# Altium PCB 1069.PcbDoc (part 2 of 3)
Units mil, origin at the board's own origin, x right, y up, seen from the top; angles counter-clockwise.
Board outline 10010 x 6010 mil, 2 copper layers (Top Layer, Bottom Layer); 500 components, 334 nets, 1630 pads, 397 vias.
Unrouted connection lines stored in the file: 1187.
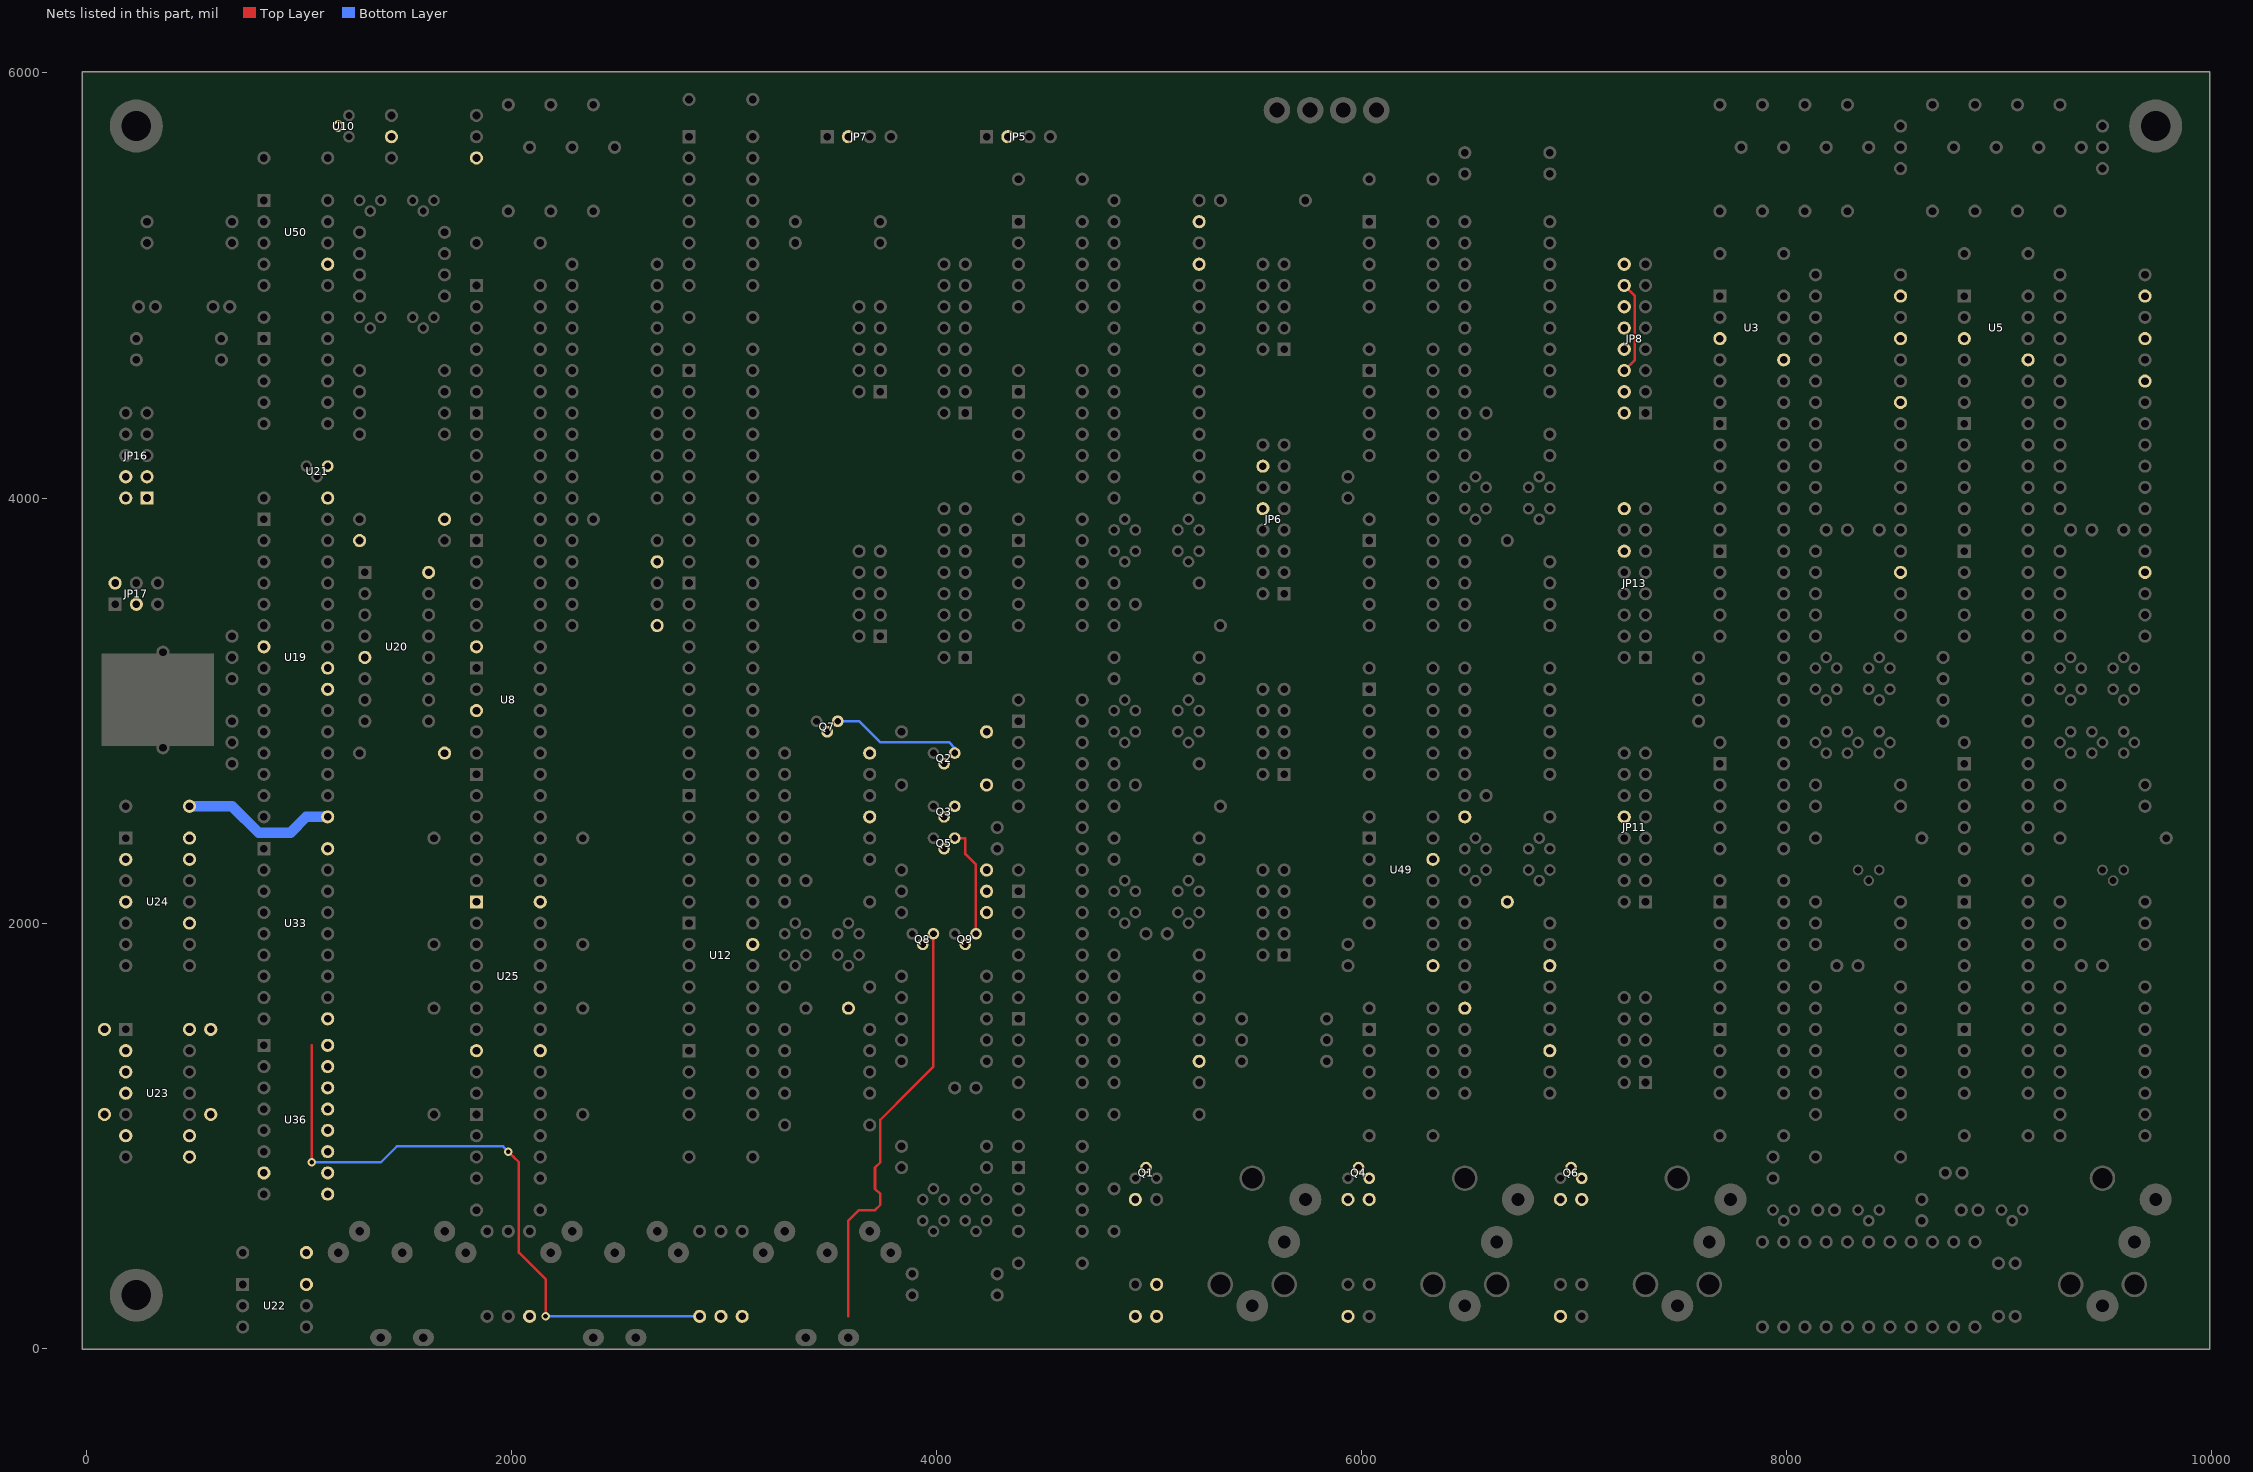
[diagram p2: the nets of this part, all layers, seen from the top]

## Via types
v1: diameter 40, hole 22, Top Layer to Bottom Layer, 395 vias
v2: diameter 62, hole 36, Top Layer to Bottom Layer, 2 vias

## Nets (pads, with @x,y where several pads share a name; then routed paths per layer and width w, separated by ;. In a path a pad name is that pad's centre, name@x,y a point inside that pad or via, vN(x,y) a via of type N, cw(c..) or ccw(c..) an arc to the next point about the centre after c; other vN are vias at no path point) (continued)
N52070: Q4.COLL R10.1
N52133: Q6.COLL R13.1
N52243: Q1.BASE R8.2
N52272: Q4.BASE R12.2
N52301: Q6.BASE R15.2
N79138: R82.2 U23.2 U23.3
N79300: R85.1 U23.6 U23.9
N451920: Q2.BASE R9.2
N453781: Q3.BASE R11.2
N454380: Q5.BASE R14.2
N455450: Q7.BASE R16.2
N456031: Q8.BASE R17.2
N457061: Q9.BASE R18.2
N515231: D1.CATH R5.2
N758691: R83.1 U23.4
N760550: R84.1 U23.8
O0: U25.1 U36.15
O1: U25.16 U36.14
O2: U25.9 U36.13
O3: U25.8 U36.12
O4: U36.11
O5: U36.10
O6: U36.9
O7: U36.7
PW1: JP13.12 R105.1
PW2: JP13.16 R183.1
REF: R20.1 R21.1 R24.2 R25.1 U10.2 U50.5
SCK: JP17.3 U20.5
SQR: D13.CATH R216.1 R218.2
VATN_H1: C105.2 JP6.14 JP8.6 JP8.14 R111.1 R127.1 R145.1 R217.1 U49.7 | length 441.4
  Top Layer w12: JP8.6@7235,4600 7285,4650 7285,4950 JP8.14@7235,5000
VATN_H2: C20.2 JP6.10 JP8.2 JP8.10 JP11.10 R28.2 R113.1 R115.1 R119.1 R147.1 R151.1 U12.7
VATN_W0: JP8.4 U5.5
VATN_W1: JP8.8 U5.3
VATN_W2: JP8.12 U3.5
VATN_W3: JP8.16 U3.3
VCC: C38.1 C39.1 C40.1 C41.1 C66.1 C124.1 D1.ANOD D2.ANOD D3.ANOD JP16.1 JP16.2 JP16.3 JP16.4 JP17.2 Q2.EMIT Q3.EMIT Q5.EMIT Q7.EMIT Q8.EMIT Q9.EMIT R79.1 R81.2 R82.1 R85.2 R86.2 R118.1 R122.1 U8.3 U19.7 U19.20 U19.21 U20.16 U21.1 U22.6 U23.14 U24.2 U24.4 U24.10 U24.13 U24.14 U33.16 U36.16 | length 6974.6
  Top Layer w12: v1(1060,875) 1060,1425 ; v1(1985,925) 2010,900 2035,875 2035,450 2160,325 v1(2160,150) ; 3585,150 3585,600 3635,650 3710,650 3735,675 3735,725 3710,750 3710,850 3735,875 3735,1075 3885,1225 3985,1325 Q8.EMIT@3985,1950 ; Q5.EMIT@4085,2400 4135,2400 4135,2325 4185,2275 Q9.EMIT@4185,1950
  Bottom Layer w12: v1(1060,875) 1385,875 1460,950 1960,950 v1(1985,925) ; v1(2160,150) R81.2@2860,150 ; Q7.EMIT@3535,2950 3635,2950 3735,2850 4060,2850 4085,2825 Q2.EMIT@4085,2800
  Bottom Layer w50: C41.1@485,2550 685,2550 810,2425 960,2425 1035,2500 C39.1@1135,2500
VP1: JP5.2 R95.1
VP2: JP7.2 R173.1
pads on no net: J1.2 J1.7 J1.8 J1.9 J2.2 J2.7 J2.8 J2.9 J3.2 J3.7 J3.8 J3.9 J4.2 J4.7 J4.8 J4.9 JP2.8 JP2.10 JP3.8 JP3.10 JP6.3 JP6.7 JP6.11 JP6.15 JP8.3 JP8.7 JP8.11 JP8.15 JP9.3 JP9.7 JP9.11 JP9.15 JP10.3 JP10.7 JP10.11 JP10.15 JP11.3 JP11.7 JP11.11 JP11.13 JP11.14 JP11.15 JP11.16 JP12.3 JP12.9 JP13.3 JP13.7 JP13.11 JP13.15 JP14.3 JP14.9 MC1.1 MC1.2 MC1.3 MC2.1 MC2.3 MC3.1 MC3.3 U22.3 U23.10 U23.11 U23.12 U23.13 U24.6 U25.12 U29.12 U30.12 U31.12 U33.7 U33.9 U38.1 U38.5 U38.8 U43.1 U43.5 U43.8 Y1.0
copper on no net: | length 883033.1
  Top Layer w12: v1(35,3750) 10,3725 10,1075 35,1050 135,1050 185,1100 ; v1(60,3800) 85,3775 85,3700 60,3675 35,3650 35,1650 185,1500 ; v1(60,3925) 60,4150 110,4200 185,4200 ; 85,1100 85,1225 160,1300 185,1300 185,1400 ; v1(235,3350) 235,3500 ; 235,4650 235,4750 ; 245.63,4900 235,4900 235,5150 260,5175 285,5200 ; 285,4200 335,4150 v1(335,3850) ; v1(310,1800) v1(310,2400) ; v1(360,1500) 360,525 435,450 v1(435,175) ; v1(485,350) 485,500 410,575 410,1550 360,1600 360,2550 v1(585,2775) ; 485,1000 585,1100 ; 485,2200 535,2200 560,2175 v1(560,1950) ; v1(585,2700) 585,2325 660,2250 660,975 685,950 685,575 610,500 v1(610,400) ; 595.63,4900 595.63,4775 620.63,4750 635,4750 ; v1(610,2200) 610,1925 585,1900 ; v1(635,925) 635,1625 585,1675 585,1900 ; v1(635,2625) 635,2325 710,2250 710,575 v1(735,550) ; 685,3150 685,3250 ; v1(685,3500) v1(685,3900) ; v1(760,2200) 860,2200 885,2225 885,3550 835,3600 ; 835,1325 885,1325 910,1350 910,2100 910,2170 935,2195 935,3325 960,3350 v1(960,3400) ; 835,1425 885,1475 885,2125 885,2190 910,2215 910,3425 935,3450 935,3475 v1(935,3500) ; 835,4650 835,4750 ; 835,5300 835,5400 ; v1(960,2150) 960,3300 985,3325 1010,3350 1010,3675 1035,3700 1135,3700 ; v1(985,5225) v1(985,5750) ; v1(1000,2250) 1000,2310 985,2325 985,3275 1060,3350 1060,3575 1085,3600 1135,3600 ; 1135,2050 1160,2075 1310,2225 1310,2525 1185,2650 1185,3025 1210,3050 1235,3050 1260,3075 1260,3480 1265,3485 v1(1265,3500) ; 1135,2600 1210,2525 v1(1210,2300) ; v1(1160,75) 1285,200 1285,550 ; v1(1210,2000) 1210,2075 1335,2200 1335,2550 1235,2650 v1(1235,2700) ; 1285,3900 1335,3850 1335,3675 1310,3650 ; 1285,4300 1285,4400 ; 1285,4600 1385,4700 1385,4850 ; 1285,5250 1335,5250 1385,5300 1385,5400 ; v1(1310,1950) 1310,2115 1415,2220 1415,2285 1435,2305 1435,2665 1360,2740 1360,2825 v1(1385,2850) ; 1310,3350 1360,3300 1360,3060 1370,3050 v1(1370,3000) ; v1(1360,3400) 1385,3375 1385,3075 1410,3050 1410,2950 1335,2875 1335,2675 1360,2650 1360,2285 1375,2270 v1(1375,2240) ; v1(1385,325) v1(1385,975) ; v1(1385,1125) v1(1385,1450) ; v1(1385,3500) 1385,3430 1410,3405 1410,3100 1435,3075 1435,2825 1410,2800 v1(1410,2750) ; v1(1385,3925) 1385,3555 1435,3505 1435,3125 1460,3100 1460,2700 1510,2650 1510,2175 1460,2125 1460,2025 1485,2000 v1(1485,1850) ; v1(1435,1750) 1435,2150 1460,2175 v1(1460,2225) ; v1(1435,3575) 1435,3550 1460,3525 1460,3175 1510,3125 v1(1510,2900) ; v1(1460,1025) v1(1460,1400) ; v1(1485,3875) 1485,3225 1560,3150 1610,3150 1610,3050 1610,2950 ; v1(1510,1225) 1510,1775 1535,1800 1535,1900 1510,1925 v1(1510,2050) ; v1(1510,4500) 1510,4825 1535,4850 ; v1(1535,3625) 1535,3275 1560,3250 1610,3250 ; 1535,5400 1535,5300 1685,5150 ; v1(1560,900) 1560,1175 1635,1250 1635,1600 ; v1(1560,1325) v1(1560,2100) ; v1(1585,2725) 1585,2325 1610,2300 v1(1610,2150) ; v1(1610,2815) 1610,2800 1635,2775 v1(1635,2600) ; 1635,4850 1635,4750 1560,4675 v1(1560,4600) 1560,4350 1610,4300 1685,4300 ; 1635,5400 1685,5350 1685,5250 1735,5200 1735,5125 1685,5075 1685,5050 1635,5000 1635,4925 1685,4875 1685,4750 1610,4675 1610,4575 1585,4550 1585,4450 1635,4400 1685,4400 ; v1(1685,1500) v1(1685,2000) ; 1835,1000 1835,1100 ; 1835,2600 1835,2700 ; 1835,5600 1835,5325 1910,5250 1910,4600 2035,4475 2035,4400 1985,4350 1985,3525 1935,3475 v1(1910,3450) ; 1835,5700 1910,5625 1910,5550 1985,5475 1985,5350 ; v1(1910,2380) 1910,2350 1970,2290 1970,2055 1960,2045 1960,1970 1970,1960 v1(1970,1900) ; v1(1985,1600) 1985,1545 2010,1520 2010,1225 2060,1175 2060,875 2135,800 ; v1(2005,2000) 2005,2035 2010,2040 2010,3150 1985,3175 v1(1985,3200) 1985,3250 2010,3275 2010,3775 2035,3800 v1(2035,3900) ; v1(2110,5775) 2110,5725 2135,5700 2135,5600 2110,5575 2110,5300 2135,5275 2235,5175 2235,5050 2285,5000 ; v1(2120,5875) 2120,5840 2185,5775 2185,5700 2160,5675 2160,5575 2135,5550 2135,5325 2285,5175 2285,5100 ; 2135,900 2135,1000 ; 2135,2500 2135,2600 ; 2135,4700 2160,4700 2185,4700 2210,4725 2210,4875 2235,4900 2285,4900 ; 2185,5350 2360,5175 v1(2360,4750) ; 2185,5850 2235,5800 2235,5700 2185,5650 2185,5475 2210,5450 2435,5450 2460,5425 v1(2460,5100) ; v1(2285,2600) v1(2285,3150) ; 2285,3400 2285,3500 ; 2285,3600 2285,3700 ; 2285,3800 2310,3775 2335,3750 v1(2335,3100) ; 2285,4000 2335,4050 2335,4150 2285,4200 ; 2285,4600 2285,4700 ; 2335,1900 v1(2335,2325) ; v1(2335,4250) 2335,4670 2410,4745 2410,5325 2385,5350 ; 2385,3900 2385,3825 2410,3800 v1(2410,3250) ; 2385,5850 2585,5850 2635,5800 2635,4975 2610,4950 2610,4525 v1(2585,4500) ; v1(2410,4650) 2360,4600 2360,4325 2385,4300 2385,4050 2460,3975 2460,3725 2435,3700 2435,3300 2460,3275 2460,2050 2435,2025 v1(2435,1950) ; v1(2460,4900) 2460,5025 2535,5100 2535,5125 v1(2535,5150) ; v1(2485,1375) 2485,1650 v1(2485,3650) ; v1(2485,4600) 2460,4575 2460,4525 2485,4500 2485,4400 2585,4300 2585,4200 2685,4100 ; v1(2510,4550) 2535,4575 2535,4650 2560,4675 2560,5000 2585,5025 2585,5700 v1(2510,5775) ; v1(2510,4800) v1(2510,5000) ; v1(2535,725) v1(2535,1000) ; v1(2535,4450) 2535,4520 2585,4570 2585,4975 2610,5000 2610,5710 2585,5735 v1(2585,5775) ; v1(2585,1450) 2585,1825 2610,1850 v1(2610,2550) ; v1(2585,3550) 2585,3400 2610,3375 2610,3075 2635,3050 v1(2635,2900) 2635,2850 2660,2825 2660,1850 2635,1825 v1(2635,1750) ; v1(2660,3100) 2660,3050 2685,3025 2685,1350 2710,1325 2835,1200 ; 2685,3400 2635,3450 2635,3650 2685,3700 ; 2685,4200 2635,4250 2635,4850 2685,4900 ; 2835,1300 2835,1400 ; 2835,5700 2960,5575 2960,5250 2945,5235 2945,5170 2960,5155 2960,3950 2970,3940 v1(2970,3900) ; v1(2895,1640) 3035,1500 v1(3035,1450) ; v1(2935,775) 2935,1075 2985,1125 v1(2985,1400) ; v1(2935,1700) 2935,1725 2960,1750 2960,2125 3010,2175 3010,2550 3035,2575 v1(3035,2600) ; v1(2935,2300) 2985,2350 2985,3525 3010,3550 3010,4050 3000,4060 v1(3000,4100) 3000,4160 2985,4180 v1(2985,5200) ; v1(2970,3600) v1(2970,3850) ; 2985,150 3035,100 3210,100 3260,150 4935,150 4985,100 5935,100 ; v1(2985,1650) 2985,1700 3010,1725 3010,1850 3000,1860 v1(3000,1900) ; v1(2985,5700) 2985,5650 3010,5625 3010,5255 3025,5240 3025,5165 3010,5150 3010,4750 v1(3035,4725) ; v1(3035,1050) 3035,900 3010,875 3010,750 3035,725 3035,375 3085,325 3085,150 ; v1(3060,825) 3060,985 3075,1000 3075,1125 3060,1140 3060,1250 3110,1300 3135,1300 ; 3135,1700 3210,1700 v1(3210,1755) ; 3135,2200 3210,2200 v1(3210,2000) ; 3285,1050 3285,1200 ; 3285,1850 3285,1775 3310,1750 3335,1750 3385,1700 3385,1600 ; 3285,1950 3385,1850 3410,1850 3510,1950 3535,1950 3635,1850 ; 3285,2100 3285,2200 ; 3285,2300 3285,2400 ; v1(3285,2950) v1(3285,4600) v1(3285,4950) ; 3335,1800 3460,1800 3485,1775 3485,1575 3560,1500 3685,1500 3685,1550 3735,1600 3735,1725 3710,1750 3710,1950 3660,2000 3585,2000 3585,2675 3610,2700 3685,2700 ; v1(3335,3600) 3335,3450 3310,3425 3310,3000 3335,2975 3335,2700 3360,2675 v1(3360,2650) ; v1(3335,4500) 3335,5200 ; v1(3360,2400) 3360,2500 3410,2550 3410,2900 3385,2925 3385,3025 3360,3050 3360,3250 3335,3275 3335,3350 v1(3385,3400) 3385,3450 3360,3475 3360,3525 3385,3550 3385,3850 3360,3875 3360,3950 3385,3975 v1(3385,4400) 3385,4525 3360,4550 3360,4725 3385,4750 v1(3385,5525) ; 3385,1950 3385,2200 ; v1(3385,3300) 3385,3075 3435,3025 3435,2950 ; v1(3410,3500) v1(3410,3900) ; v1(3435,1450) v1(3435,1700) ; v1(3460,3200) v1(3460,3450) v1(3460,4350) 3460,4400 3485,4425 3485,4725 3460,4750 3460,5150 v1(3460,5250) ; v1(3460,5525) 3460,5350 3510,5300 3510,5240 3485,5215 3485,4775 3510,4750 3510,3975 3485,3950 3485,3810 3510,3785 v1(3510,3100) ; v1(3500,2815) 3585,2900 3585,3150 3560,3175 3535,3200 3535,3810 3510,3835 3510,3925 3535,3950 3535,4975 v1(3535,5000) ; v1(3535,2250) 3535,2750 3685,2900 3685,3150 3585,3250 3585,3800 3585,3825 v1(3560,3850) ; v1(3575,4050) 3560,4065 3560,4585 3575,4600 v1(3575,4650) ; 3635,1950 3685,1900 3685,1700 ; v1(3685,700) 3685,950 3610,1025 3610,1225 3685,1300 ; 3685,1200 3760,1275 3760,1750 3735,1775 v1(3735,3200) ; v1(3685,4975) 3685,3950 3710,3925 v1(3735,3900) ; 3735,3550 3785,3500 3785,2625 3885,2525 3885,1950 ; 3735,3650 3810,3575 3810,3100 3910,3000 3910,2925 3885,2900 3885,2675 3910,2650 3910,2500 3935,2475 3935,2250 4085,2100 4085,1950 ; v1(3760,825) 3810,775 3810,575 3885,500 3885,425 3835,375 3835,300 3885,250 ; v1(3785,2500) 3785,2450 3760,2425 3760,1800 3785,1775 3785,1725 3810,1700 3860,1700 3885,1675 v1(3885,1600) ; v1(3785,3825) 3785,3850 3810,3875 3810,4375 v1(3785,4400) ; v1(3810,2325) 3810,2300 3785,2275 3785,1850 3835,1800 3835,1750 ; 3835,850 3835,800 3935,700 4035,600 4135,700 4235,600 ; 3835,1550 3835,1650 ; 3835,2050 3835,1875 3885,1825 3885,1725 v1(3935,1675) ; v1(3860,4700) 3860,4475 3860,3150 3960,3050 3960,2875 3935,2850 3935,2725 3985,2675 3985,2550 ; v1(3860,4800) 3860,4775 3810,4725 3810,4685 3835,4660 3835,4450 3835,3125 3935,3025 3935,2900 3910,2875 3910,2850 3910,2700 3935,2675 3935,2525 3985,2475 3985,2400 ; 3885,350 3985,450 3985,550 ; v1(3885,5050) 3910,5025 v1(3910,4575) ; v1(3910,4500) 3885,4475 3885,3175 3985,3075 3985,2800 ; 3935,1900 v1(3935,2150) ; v1(3935,3350) 3935,3225 4035,3125 v1(4035,3025) ; v1(3935,3550) 3935,3590 3960,3615 3960,5300 3985,5325 v1(3985,5600) ; v1(3985,1250) 4110,1375 4110,1625 4135,1650 4235,1650 4235,1750 ; v1(4035,950) 4035,700 4035,1175 4085,1225 ; 4035,5100 4085,5150 4185,5150 4210,5125 v1(4210,4000) ; v1(4035,5650) 4035,5325 3985,5275 3985,5000 ; v1(4085,3125) 4085,3175 4035,3225 4035,3250 3985,3250 3985,3450 ; 4135,1900 4210,1900 4235,1925 4235,2050 ; 4135,3250 4085,3250 4085,3450 ; 4135,5000 4085,5000 4085,4800 ; 4185,1225 4185,1175 4160,1150 4160,900 4210,850 4235,850 ; v1(4185,3075) 4210,3100 v1(4210,3900) ; 4235,5700 v1(4235,5900) ; 4285,2350 4285,2450 ; v1(4485,4700) 4485,4675 4535,4625 v1(4535,4400) ; v1(4500,1800) 4500,2155 4515,2170 v1(4515,2200) ; v1(4510,2350) 4610,2250 4610,2140 4565,2095 v1(4565,2050) ; v1(4520,3700) v1(4520,3850) ; v1(4535,2500) v1(4535,2950) ; v1(4535,3450) 4535,3500 4560,3525 v1(4560,3800) ; 4535,5700 v1(4535,5900) ; v1(4545,1900) 4545,1930 4525,1950 4525,2125 v1(4550,2150) ; v1(4610,500) 4610,650 4685,725 4685,750 ; 4685,2550 4760,2550 v1(4760,2200) ; 4760,1975 v1(4785,1975) ; 4760,3700 4885,3700 ; 4835,1100 4960,1225 4960,1500 4910,1550 4835,1550 ; 4835,1750 4860,1725 4885,1700 4960,1700 4985,1725 4985,1900 4985,1950 ; 4835,2150 4935,2050 v1(4935,1750) ; 4835,2400 4935,2500 4935,2650 4885,2700 4885,2775 4835,2825 4835,2900 ; 4835,2650 4835,2750 ; 4835,3000 4935,2900 v1(4935,2750) ; 4835,3250 4885,3300 4885,3450 4835,3500 ; 4835,3850 4935,3750 v1(4935,3600) ; 4835,4100 4835,4200 4835,4300 ; 4835,4400 4910,4400 4935,4375 4935,4050 5010,3975 5010,3525 5035,3500 5035,3350 5010,3325 v1(5010,3250) ; 4835,4500 4860,4500 4910,4550 4910,4825 4835,4900 ; 4835,4600 4835,4700 4835,4800 ; 4835,5200 4885,5200 4910,5175 4910,4900 4960,4850 v1(4960,4800) ; 4835,5400 5060,5400 5135,5325 5135,4650 5185,4600 5235,4600 ; 4935,300 v1(4935,625) ; 4935,700 4985,750 4985,850 ; 4935,800 v1(4935,1025) ; 4935,3000 4935,2975 4985,2925 4985,2725 5010,2700 v1(5010,2550) ; 4935,3850 4935,3825 4985,3775 v1(4985,3400) ; v1(5010,2025) v1(5010,2200) ; 5035,150 5035,300 ; 5035,700 5035,800 ; v1(5035,2850) 5035,2925 5010,2950 4985,2975 v1(4985,3050) 4985,3150 5060,3225 5185,3350 5185,3700 5110,3700 5085,3725 v1(5085,3900) v1(5085,4900) ; v1(5085,1350) v1(5085,1600) ; v1(5085,1675) 5085,1950 5085,2025 5110,2050 5135,2050 ; v1(5135,2300) 5135,2150 5235,2050 ; v1(5135,3150) 5135,3000 5235,2900 ; v1(5135,4000) 5135,3850 5235,3750 ; 5235,1250 5285,1250 5310,1275 5310,1875 5335,1900 5335,2025 5335,2155 5310,2180 5310,2475 5285,2500 5285,2575 5360,2650 5360,3175 v1(5335,3200) ; 5235,1450 5235,1550 ; 5235,1850 5235,1900 5285,1950 5285,2100 5235,2150 ; 5235,2300 5185,2350 5185,2525 5335,2675 5335,3125 5310,3150 5235,3150 5285,3150 5285,3175 5285,3275 5260,3300 5260,3475 5285,3500 5310,3500 5335,3525 5335,3725 5285,3775 5285,3950 5235,4000 ; 5235,4200 5310,4125 5310,3800 5360,3750 5360,3500 5335,3475 5310,3475 5285,3450 5285,3325 5410,3200 5410,2850 5385,2825 5385,2600 5335,2550 ; 5235,4300 5310,4375 v1(5310,5250) ; 5235,4900 5235,5000 ; 5335,3400 5335,3325 5435,3225 v1(5435,2800) v1(5435,2400) ; v1(5360,2200) 5360,2050 5435,1975 5435,1550 ; v1(5360,4700) 5360,4675 5385,4650 5385,4475 5410,4450 5410,4200 5335,4125 5335,3850 5535,3650 ; v1(5385,2350) 5410,2325 5410,2075 5535,1950 ; v1(5385,4100) 5385,4000 5535,3850 ; v1(5385,5100) 5385,5000 5360,4975 5360,4925 5410,4875 5410,4500 5435,4475 5435,4050 5535,3950 ; v1(5410,4950) 5410,4925 5435,4900 5435,4525 5460,4500 5460,4125 5535,4050 ; v1(5435,900) 5435,1350 ; 5435,1450 5435,1550 ; v1(5435,5350) 5435,5030 5460,5005 5460,4550 5485,4525 5485,4200 5535,4150 ; v1(5485,2450) 5485,2350 5460,2325 5460,2125 5535,2050 ; v1(5485,3250) 5485,3225 5460,3200 5460,2975 5535,2900 ; v1(5485,5050) 5485,4575 5535,4525 5535,4250 ; v1(5535,1650) 5535,1850 ; 5535,3750 5585,3700 5585,3450 5560,3425 v1(5560,3400) ; v1(5710,2750) v1(5710,3450) ; v1(5785,2350) v1(5785,4100) ; v1(5835,2850) v1(5835,3150) ; v1(5835,5150) v1(5835,5700) ; v1(5860,2400) 5860,2000 5935,1925 5935,1900 5935,1800 ; v1(5885,4600) 5885,4150 5935,4100 ; v1(5885,5350) v1(5885,5650) ; 5935,300 v1(5935,600) ; 5935,700 5985,750 5985,850 ; 5935,800 v1(5935,925) ; 6035,150 6035,300 ; 6035,700 6035,800 ; v1(6135,5000) 6135,4775 6160,4750 v1(6160,3550) ; v1(6185,1300) 6185,1350 6160,1375 6160,1650 6135,1675 6135,1850 6160,1875 6160,2525 v1(6185,2550) ; v1(6185,2900) 6185,2660 v1(6245,2600) v1(6245,2390) ; v1(6195,1800) 6195,2415 6205,2425 v1(6205,2450) ; v1(6200,3700) v1(6200,3940) ; v1(6200,4350) v1(6200,4500) ; v1(6200,4600) v1(6200,4750) ; v1(6260,4625) 6260,4680 6260,4775 6185,4850 v1(6185,5200) 6185,5225 6210,5250 6210,5525 6310,5625 6485,5625 ; 6335,5100 6435,5200 6435,5425 6485,5475 6485,5525 ; 6485,1300 6660,1300 6710,1350 6960,1350 7010,1400 v1(7010,2900) ; 6485,2000 6535,2050 6535,2200 ; 6485,2700 6535,2650 6535,2475 6485,2425 6485,2350 6585,2250 ; 6485,2800 6485,2900 6485,3000 ; 6485,3100 6485,3200 ; 6485,3700 6535,3700 6560,3725 6560,3800 6685,3925 v1(6685,4200) ; 6485,4300 6535,4250 6535,4175 6485,4125 6485,4050 6585,3950 ; 6485,4400 6485,4375 6585,4275 6585,4050 ; 6485,4500 6485,4600 ; 6485,4800 6485,4900 6485,5000 6485,5075 6485,5100 6485,5200 6485,5300 ; 6535,3900 6610,3900 6635,3925 v1(6635,4100) ; 6585,2350 6635,2300 v1(6635,2050) ; 6585,2600 v1(6585,2950) ; v1(6610,3550) v1(6610,3775) ; v1(6610,5575) 6610,5200 6760,5050 v1(6760,4950) ; 6685,2100 6685,2000 6885,1800 ; v1(6685,2175) 6735,2225 6735,2375 6760,2400 6835,2400 6835,2450 6810,2475 6810,2575 6810,3150 6860,3200 6885,3200 ; 6685,3800 6785,3900 6785,3950 ; v1(6760,3350) 6760,3450 6785,3475 6810,3500 6885,3500 ; 6785,2350 6885,2250 ; 6785,4050 6885,3950 ; v1(6885,925) 6885,1200 7035,1350 7035,2250 7060,2275 v1(7060,2300) ; 6885,1400 6935,1400 6985,1450 6985,2450 6960,2475 v1(6960,2500) v1(6960,4400) ; 6885,1600 6885,1700 ; 6885,4050 6885,4200 ; 6885,4500 6960,4500 6985,4475 7010,4450 v1(7010,3350) ; 6885,5525 6960,5525 6985,5500 6985,5375 7060,5300 v1(7060,3450) ; 6935,150 6935,100 5935,100 ; 6935,300 v1(6935,600) ; 6935,700 6985,750 6985,850 ; 6935,800 v1(6935,1000) ; 7035,150 7035,300 ; 7035,700 7035,800 ; v1(7035,3000) 7035,2950 7060,2925 7060,2875 7035,2850 7035,2500 7135,2400 7135,2250 7085,2200 7085,1625 7110,1600 v1(7110,1550) ; v1(7060,1175) 7060,2225 7085,2250 7110,2275 7110,2325 7060,2375 v1(7060,2400) ; v1(7110,3850) v1(7110,4250) ; v1(7135,1150) 7135,1475 7210,1550 7235,1550 ; v1(7160,4000) 7160,3825 7235,3750 ; v1(7210,2875) 7185,2850 7185,2250 7235,2200 ; 7235,2100 7160,2175 7160,3175 7235,3250 ; 7235,3650 7285,3700 7285,3800 7235,3850 ; 7235,3950 v1(7235,4100) ; 7235,4400 7185,4400 7160,4425 7160,4725 7235,4800 7185,4850 7185,5225 7235,5275 v1(7235,5510) ; 7235,5000 7285,5050 7285,5225 7385,5325 v1(7610,5325) ; 7335,3650 7385,3700 7385,3800 7335,3850 ; v1(7385,625) 7385,875 7485,975 v1(7485,1600) ; v1(7485,4750) v1(7485,5125) ; v1(7510,3650) 7510,3025 7560,2975 7585,2950 ; v1(7535,4600) 7535,4850 v1(7535,4950) ; v1(7760,3400) 7760,3450 7810,3500 7810,3560 7798,3572 7798,3633 7810,3645 7810,4500 7735,4575 7735,5225 7685,5275 7685,5350 7685,5475 7785,5575 7785,5650 ; v1(7810,3250) 7810,3450 7835,3475 v1(7835,3600) ; v1(7850,4150) 7850,4110 7860,4100 7860,3650 7872,3638 7872,3572 7860,3560 v1(7860,2875) ; v1(7850,4250) 7860,4260 7860,4300 7885,4325 v1(7885,4450) ; 7885,500 7885,450 7860,425 7860,325 7985,200 7985,100 ; 7885,5350 7885,5550 7985,5650 ; 7985,500 8035,550 8035,650 ; 7985,600 7935,550 7935,350 8110,175 8185,100 ; 8060,2850 8135,2850 ; 8085,5350 8085,5300 8110,5275 8110,5175 8185,5100 8185,4300 8135,4250 ; 8135,1500 8135,1600 8135,1700 ; 8135,2000 8235,1900 8235,1800 ; 8135,2400 8135,2450 v1(8285,2600) ; 8135,2650 8135,2750 8185,2800 8285,2900 ; 8135,3200 8235,3100 ; 8135,4150 8135,4050 8185,4000 8185,3925 8135,3875 8135,3750 8135,3650 8135,3550 8135,3450 8235,3350 8235,3200 ; 8135,4450 8135,4550 8135,4650 ; v1(8160,5750) 8160,5725 8135,5700 8135,5600 8160,5575 8160,5175 8210,5125 8285,5050 8285,4050 8335,4000 8335,3825 8310,3800 8310,3750 8360,3700 8360,3400 8435,3325 8535,3225 v1(8535,2950) 8535,2800 v1(8510,2775) ; 8185,500 8185,575 8210,600 8235,625 8235,650 8224.37,650 ; 8185,3050 8260,3050 8285,3075 v1(8285,3250) ; 8185,5650 8185,5200 8360,5025 8360,4525 8385,4500 8385,4100 8435,4050 8535,4050 ; v1(8235,2000) v1(8235,2450) ; 8285,100 8285,200 8485,400 8485,500 ; 8285,500 8285,575 8335,625 8335,650 ; v1(8285,3700) 8285,3850 ; v1(8285,3950) 8285,3850 ; 8285,5350 8285,5475 8360,5550 8385,5575 8385,5650 ; 8285,5850 8285,5575 8235,5525 8235,5200 8385,5050 8385,4975 8460,4900 8460,4525 8435,4500 8410,4475 8410,4225 8485,4150 8535,4150 ; v1(8310,300) 8385,375 8385,500 8435,550 8435,650 ; v1(8335,1950) 8335,1800 8335,2250 ; v1(8335,4100) v1(8335,4450) ; 8385,2200 v1(8385,2600) ; 8385,3100 8385,3025 8435,2975 8460,2975 8485,2950 8485,2850 ; 8385,3200 8485,3100 ; v1(8385,3900) 8360,3875 8360,3750 8385,3725 8385,3425 8460,3350 8560,3250 8560,3050 8585,3025 8585,2925 8560,2900 8560,2750 8535,2725 8535,2650 ; v1(8410,4550) v1(8410,4860) ; 8435,2800 8385,2850 8385,2950 8310,3025 8310,3200 8335,3225 8335,3325 8310,3350 8285,3375 8285,3850 ; v1(8435,3600) 8435,3750 8535,3850 ; v1(8460,1100) 8460,1325 8535,1400 ; v1(8460,5300) 8460,5000 8510,4950 8535,4950 ; v1(8485,3500) 8485,3700 8535,3750 ; v1(8485,5925) 8485,5500 8585,5400 8585,4250 8635,4200 8635,4075 8585,4025 8585,3875 8610,3850 8610,3725 8535,3650 ; 8535,900 8535,1100 ; 8535,1200 8585,1250 8610,1275 8710,1375 8710,2875 8685,2900 8685,3225 8660,3250 8635,3275 8635,3375 8685,3425 8685,3915 8690,3920 8690,4015 8685,4020 8685,4250 8660,4275 v1(8660,4300) ; 8535,1300 8585,1350 8585,1450 8535,1500 ; 8535,1600 8485,1650 8485,1950 8535,2000 ; 8535,1700 8585,1750 8585,2875 8610,2900 8610,3050 8585,3075 8585,3425 8635,3475 8635,3875 8610,3900 8610,4000 8660,4050 8660,4225 8610,4275 8610,5525 8635,5550 v1(8635,5600) ; 8535,5550 8535,5575 8585,5625 8585,5750 8685,5850 ; 8635,700 8560,625 8560,550 8535,525 8535,350 8685,200 8685,100 ; v1(8635,1900) 8685,1950 8685,2850 8660,2875 8660,3200 8610,3250 8610,3400 8660,3450 8660,3900 8650,3910 v1(8650,3950) ; v1(8660,4650) v1(8660,5075) ; v1(8685,3300) 8685,3375 8710,3400 8710,3895 8715,3900 8715,3965 8715,4030 8710,4035 8710,5225 8685,5250 8685,5275 8685,5350 8685,5425 8785,5525 8785,5650 ; 8735,825 8735,725 8760,700 8760,625 8885,500 ; 8810,825 8835,825 8885,825 8960,900 8960,1725 v1(8935,1750) ; 8885,5350 8885,5425 8985,5525 8985,5650 ; v1(8960,4550) v1(8960,4650) ; v1(8970,4250) v1(8970,4400) ; v1(8985,4150) 8985,4125 9010,4100 9010,3925 8960,3875 8960,3600 8960,2925 v1(9035,2850) ; 8995.63,400 8995.63,450 9110,564.37 9110,650 ; v1(9000,3250) v1(9000,3600) ; v1(9000,3650) 9000,3690 9010,3700 9035,3725 v1(9035,3850) ; v1(9010,4300) 9010,5175 9085,5250 9085,5350 ; 9210,2850 9285,2850 ; 9285,1500 9285,1600 9285,1700 ; 9285,2000 9385,1900 9385,1800 ; 9285,2550 9410,2425 v1(9410,2000) ; 9285,2650 9285,2750 9335,2800 9435,2900 ; 9285,3200 9385,3100 ; 9285,4150 9285,4050 9335,4000 9335,3850 9285,3800 9285,3750 9285,3650 9285,3550 9285,3450 9385,3350 9385,3200 ; 9285,4450 9285,4550 9285,4650 ; 9285,4850 9335,4850 9385,4800 v1(9385,3500) ; 9285,5050 9385,5050 9410,5025 9410,4050 9485,3975 v1(9485,3450) ; 9285,5350 9285,5450 9385,5550 9385,5650 ; 9335,3050 9410,3050 9435,3075 v1(9435,3250) ; v1(9435,3600) 9435,3850 ; v1(9435,5425) 9485,5375 9485,4050 9635,3900 9635,3700 9685,3650 ; 9485,1800 v1(9485,2050) ; 9485,2250 9535,2300 9610,2300 9635,2275 9635,2150 9685,2100 ; 9485,5550 9485,5450 9585,5350 9585,4050 9685,3950 ; v1(9510,1100) v1(9510,1400) ; 9535,3100 9535,3025 9635,2925 9635,2850 ; 9535,3200 9635,3100 ; v1(9535,4100) v1(9535,4550) ; v1(9560,5600) 9560,5550 9610,5500 9610,4125 9685,4050 ; 9585,3250 9685,3350 ; v1(9585,5850) 9585,5650 9635,5600 9635,4200 9685,4150 ; 9685,1000 9685,1100 ; 9685,1200 9710,1200 9835,1325 9835,2500 9785,2550 9785,2850 9735,2900 9735,3150 9785,3200 9785,3725 9835,3775 9835,3875 9810,3900 9760,3950 9760,4250 9785,4275 v1(9785,4300) ; 9685,1300 9735,1350 9735,1450 9685,1500 ; 9685,1600 9635,1675 9635,1975 9685,2000 ; 9685,1700 9735,1750 9735,2350 9635,2450 9635,2700 9685,2750 9685,3200 9735,3250 v1(9735,5300) ; 9685,2550 9785,2450 9785,2400 ; v1(9735,2800) 9735,2825 9710,2850 9710,3175 9760,3225 9760,3775 9785,3800 v1(9785,3850) ; v1(9835,2650) 9835,2700 9810,2725 9810,2875 9760,2925 9760,3125 9810,3175 9810,3700 9885,3775 v1(9885,3800) ; 585,1900 485,1900 585,1900 ; 3985,3450 4035,3450 3985,3450 ; 3985,3450 3985,3650 ; 3985,3650 4035,3650 3985,3650 ; 3985,3650 3985,3850 ; 3985,3850 4035,3850 3985,3850 ; 3985,3850 3985,4400 ; 3985,4400 4035,4400 3985,4400 ; 3985,4400 3985,4600 ; 3985,4600 4035,4600 3985,4600 ; 3985,4600 3985,4800 ; 3985,4800 4035,4800 4010,4800 3985,4800 ; 3985,4800 3985,5000 ; 3985,5000 4035,5000 3985,5000 ; 4085,3450 4135,3450 4085,3450 ; 4085,3450 4085,3650 ; 4085,3650 4135,3650 4085,3650 ; 4085,3650 4085,3850 ; 4085,3850 4135,3850 4085,3850 ; 4085,3850 4085,4400 ; 4085,4400 4135,4400 4085,4400 ; 4085,4400 4085,4600 ; 4085,4600 4135,4600 4085,4600 ; 4085,4600 4085,4800 ; 4085,4800 4135,4800 4085,4800 ; 5435,1550 5435,1575 5435,1550 ; 5510,3350 5510,3475 ; 5510,3350 5510,3475 ; 5510,3350 5560,3300 ; 5510,3350 5560,3300 ; 5510,3475 5535,3500 ; 5510,3475 5535,3500 ; 5535,3500 5535,3525 5535,3550 5535,3500 ; 5560,3300 v1(5560,3250) 5560,3300 ; 5935,100 5935,150 5935,100 ; v1(8285,2600) 8285,2800 v1(8285,2600)
  Top Layer w25: 1110,2250 1235,2250 1260,2275 v1(1260,2400) ; 6885,1900 6885,2000 ; 7935,900 7910,900 7860,850 7860,725 7910,675 7935,650 7985,600 ; 8485,100 8485,40 8585,40 ; 9074.37,150 9074.37,400 ; 9135,1500 9060,1425 9060,925 8960,825 8960,575 8985,550 8985,500 8885,400 8885,100 8885,40 8585,40 ; v1(9210,3000) 9210,3350 ; 9335,3250 9210,3250 9210,3350 ; 8585,40 8585,100 8585,40 ; 9210,3350 9135,3350 9210,3350
  Top Layer w30: 4385,5500 4435,5550 4435,5700
  Top Layer w40: 4615,1995 4615,2080
  Top Layer w45: 2900,5055 2900,5320 ; 3070,5135 3070,5355
  Top Layer w50: 135,3600 135,3900 185,3950 185,4000 ; 185,900 260,900 260,1575 185,1575 185,1800 110,1800 110,2550 185,2550 ; 285,4000 285,4100 ; 335,4900 335,4975 360,5000 635,5000 685,4950 685,4900 ; 485,1500 485,1600 410,1675 410,2000 ; 485,2550 485,2400 410,2400 410,2300 ; 835,1650 760,1650 760,1550 ; 835,2350 835,2500 760,2500 760,2750 ; 835,4000 760,4000 985,4000 1085,4100 ; 835,4350 835,4450 910,4525 910,4875 835,4950 835,5000 835,5100 ; 835,4850 760,4850 760,4900 ; 835,5600 835,5500 760,5500 760,5300 ; 1035,200 885,200 835,250 835,725 760,725 760,1025 ; 1035,300 1035,450 1035,525 1060,550 1060,1425 ; 1035,4150 1035,4200 1060,4225 1060,4675 1135,4750 1135,4850 1135,4900 1060,4975 1060,5325 1135,5400 1135,5600 1135,5625 1110,5650 1110,5925 1135,5950 3060,5950 ; 1135,3200 1210,3200 1210,3100 ; 1135,4150 1160,4150 1160,4075 1135,4050 1135,4000 1210,4000 1210,3800 ; 1235,5800 1260,5800 1310,5750 1310,5600 1210,5500 1210,5000 ; 1310,2950 1310,3050 1310,3150 ; 1585,50 1585,675 1610,700 1760,850 1760,1100 ; v2(1685,3000) 1685,2800 1685,3650 ; v2(1685,3300) 1685,3625 1685,3650 ; 1685,3900 1610,3900 1610,3650 ; 1835,650 1835,800 1910,875 1910,1300 ; 1835,1700 1760,1700 1760,1200 ; 1835,2200 1760,2200 1760,2400 ; 1835,3900 1760,3900 1760,3600 ; 1835,4700 1835,4600 1910,4525 1910,4175 1835,4100 1835,4000 1910,3925 1910,3575 1835,3500 1835,3400 1910,3325 1910,2475 1835,2400 1835,2300 1910,2225 1910,1800 ; 1835,5200 1835,5075 1760,5075 1760,4500 ; 2135,650 2135,700 2210,700 2210,1100 ; 2135,1100 2135,1200 2060,1275 2060,1800 ; 2135,4600 2210,4600 2210,4000 ; 2485,450 2485,300 2585,200 2585,50 ; 2685,3500 2760,3500 ; 2835,900 2835,1100 2910,1175 2910,1525 2835,1600 2835,1700 2910,1775 2910,2125 2835,2200 2835,2300 2910,2375 2910,2800 ; 2835,1500 2760,1500 2760,1800 ; 2835,3500 2760,3500 ; 2835,5400 2910,5400 2910,5330 2900,5320 ; 2835,5875 2835,5775 2760,5775 2760,5600 ; 2900,5055 2910,5045 2910,4975 2835,4900 2835,4850 2835,4800 2910,4725 2910,4300 ; 3070,5135 3060,5125 3060,4825 3135,4750 3135,4700 3060,4625 3060,4300 ; 3070,5355 3060,5365 3060,5400 ; 3135,1400 3135,1500 3060,1575 3060,1925 3135,2000 3135,2100 3060,2175 3060,2525 3135,2600 3135,2700 3060,2700 3060,3300 ; 3335,5300 3210,5300 3210,4850 ; 3485,450 3485,650 3235,900 3135,900 3135,1000 3185,1000 3210,1000 3210,1500 ; 3635,3350 3635,3450 3635,3550 3635,3650 3635,3750 3635,4500 3635,4600 3635,4700 3635,4800 3635,4900 ; 4085,2400 4135,2400 4135,2550 ; 4085,2800 4135,2800 4135,2550 ; 4285,350 4285,400 4310,425 4310,650 ; 4385,400 4385,550 4460,625 4460,975 4385,1050 4385,1100 4385,1250 4460,1325 4460,1675 4385,1750 4385,1850 4455,1920 4455,2280 4435,2300 4435,2500 4385,2550 4385,2650 4460,2725 4460,3075 4385,3150 4385,3400 4385,3500 4460,3575 4460,3925 4385,4000 4385,4100 4385,4200 4460,4275 4460,4625 4385,4700 4385,4900 4385,5000 ; 4385,5500 4385,5375 4310,5375 4310,4600 ; 4615,1995 4615,1720 4685,1650 4685,1550 4610,1475 4610,1075 4685,1000 4685,950 4685,850 ; 4615,2080 4685,2150 4685,2250 4610,2325 4610,2875 4685,2950 4685,3300 4610,3375 4610,3725 4685,3800 4685,3900 4685,4000 4610,4075 4610,4425 4685,4500 4685,4600 4685,4800 4610,4875 4610,5225 4685,5300 4685,5500 ; 4685,400 4685,550 4760,550 4760,1100 ; 4835,5000 4760,5000 4760,4900 ; 5635,1850 5635,1950 5635,2050 5635,2150 5635,2250 5635,2700 5635,2800 5635,2900 5635,3000 5635,3100 5635,3550 5710,3550 5710,3750 ; 5635,4150 5710,4150 5710,3950 ; 5635,4700 5635,4800 5635,4900 5635,5000 5635,5100 ; 5835,1450 5960,1450 5960,1600 ; 5913,5825 6035,5703 6035,5500 6035,5375 5960,5375 5960,5100 ; 6035,1000 6035,1200 6110,1275 6110,1625 6085,1650 6085,1950 6035,2000 6035,2100 6110,2175 6110,2525 6035,2600 6035,2700 6035,2800 6110,2875 6110,3225 6035,3300 6035,3400 6035,3500 6110,3575 6110,3950 6085,3975 6085,4150 6035,4200 6035,4300 6110,4375 6110,4725 6035,4800 6035,4900 6035,5000 6110,5075 6110,5750 6060,5800 6069,5825 ; 6335,1500 6335,1600 6335,1675 6260,1750 6260,1800 6260,1875 6260,2325 6335,2400 6335,2500 6335,2525 6335,2600 6260,2675 6260,3025 6335,3100 6335,3200 6335,3300 6260,3375 6260,3725 6335,3800 6335,3900 6260,3975 6260,4525 6335,4600 6335,4700 6335,4800 6260,4875 6260,5225 6335,5300 6335,5500 ; 6335,3400 6410,3400 ; 6335,4900 6410,4900 6410,4300 ; 6485,200 6485,425 6335,575 6335,1000 6335,1125 6410,1125 6410,1700 ; 6485,3400 6410,3400 ; 7335,1250 7335,1350 7335,1450 7335,1550 7335,1650 7335,2100 7410,2100 7410,2300 ; 7335,2500 7410,2500 7410,2300 ; 7335,3250 7410,3250 7410,3450 7335,3450 ; 7335,4400 7410,4400 7410,4600 ; 7335,5000 7410,5000 7410,4800 ; 7685,1000 7685,1200 7760,1275 7760,1625 7685,1700 7685,1800 7760,1875 7760,2100 ; 7685,1300 7610,1300 7610,1600 ; 7685,1600 7610,1600 ; 7685,2200 7610,2200 ; 7685,4650 7685,4550 7760,4475 7760,4125 7685,4050 7685,3950 7755,3880 7755,3520 7685,3450 7685,3350 7735,3300 7735,2925 7760,2900 7760,2525 7685,2450 7685,2350 7685,2300 7760,2225 7760,2100 ; 7685,5150 7685,5050 7610,5050 7610,4450 ; 7935,900 7985,900 7985,1000 7985,1075 8060,1150 8060,1700 ; 7985,1500 7985,1600 7910,1675 7910,1725 7935,1750 7985,1800 7985,1900 7910,1975 7910,2025 7985,2100 7985,2200 7985,2250 7910,2325 7910,2650 ; 7985,5150 7985,4950 7910,4875 7910,4525 7985,4450 7985,4350 7910,4275 7910,3925 7985,3850 7985,3750 7915,3680 7915,2920 7985,2850 7910,2775 7910,2650 ; 8085,5850 8085,5475 8010,5400 8010,5300 8060,5250 8060,4550 ; 8735,3150 8810,3150 8810,3050 ; 8835,1000 8835,1200 8910,1275 8910,1625 8835,1700 8835,1800 8910,1875 8910,1975 8910,2100 ; 8835,1300 8760,1300 8760,1600 ; 8835,4650 8835,4550 8910,4475 8910,4125 8835,4050 8835,3950 8910,3875 8910,3525 8835,3450 8835,3350 8885,3300 8885,2900 8910,2875 8910,2525 8835,2450 8835,2350 8835,2300 8910,2225 8910,2100 ; 9085,5850 9085,5550 9210,5425 9210,4550 ; 9110,5525 8985,5400 8985,5300 8835,5150 8835,5100 8760,5025 8760,4450 ; 9135,1500 9135,1600 9060,1675 9060,1725 ; 9135,5150 9135,4950 9060,4875 9060,4525 9135,4450 9135,4350 9060,4275 9060,3925 9135,3850 9135,3750 9060,3675 9060,2925 9135,2850 9060,2775 9060,2650 ; 9285,1000 9135,1000 9210,1000 9210,1700 ; 410,2000 460,2000 485,2000 410,2000 ; 410,2000 410,2300 ; 410,2300 485,2300 410,2300 ; 674.37,4900 760,4900 ; 674.37,4900 760,4900 ; 674.37,4900 685,4900 ; 685,4900 760,4900 ; 760,1025 835,1025 760,1025 ; 760,1025 760,1125 ; 760,1125 835,1125 760,1125 ; 760,1125 760,1225 ; 760,1225 835,1225 760,1225 ; 760,1225 760,1550 ; 760,1550 835,1550 760,1550 ; 760,2750 685,2750 760,2750 ; 760,2750 760,3200 ; 760,3200 835,3200 760,3200 ; 760,3200 760,3350 ; 760,3350 685,3350 760,3350 ; 760,3350 760,4650 ; 760,4650 635,4650 760,4650 ; 760,4650 760,4900 ; 760,4900 760,5300 ; 760,5300 685,5300 760,5300 ; 1060,1425 1135,1425 1060,1425 ; 1060,1425 1060,1550 ; 1060,1550 1135,1550 1060,1550 ; 1060,1550 1060,2350 1135,2350 1135,2500 1060,2500 1060,3100 1135,3100 ; 1135,3100 1210,3100 ; 1135,3100 1210,3100 ; 1135,4450 1210,4450 1210,5000 ; 1135,4450 1135,4350 1135,4450 ; 1210,3100 1210,3800 ; 1210,3800 1285,3800 1210,3800 ; 1210,5000 1135,5000 1210,5000 ; 1610,3650 1685,3650 ; 1610,3650 1685,3650 ; 1760,1100 1635,1100 1760,1100 ; 1760,1100 1760,1200 ; 1760,1200 1835,1200 ; 1760,1200 1835,1200 ; 1760,1200 1835,1200 ; 1760,1200 1760,4500 ; 1760,2400 1635,2400 1660,2400 1760,2400 ; 1760,2400 1760,2800 ; 1760,2800 1835,2800 1760,2800 ; 1760,2800 1760,3100 ; 1760,3100 1835,3100 1760,3100 ; 1760,3100 1760,3600 ; 1760,3600 1835,3600 1760,3600 ; 1760,4500 1835,4500 1760,4500 ; 1910,1300 1835,1300 1910,1300 ; 1910,1300 1910,1800 ; 1910,1800 1835,1800 1910,1800 ; 2060,1800 2135,1800 2060,1800 ; 2060,1800 2060,2200 ; 2060,2200 2135,2200 2060,2200 ; 2060,2200 2060,2625 2135,2700 2135,2800 2060,2875 2060,3725 2135,3800 2135,3900 2060,3975 2060,4325 2085,4350 2135,4400 2135,4500 2060,4575 2060,4925 2135,5000 2135,5200 2060,5275 2060,5550 2010,5600 2010,5750 2060,5800 2060,5875 2060,5950 3060,5950 ; 2210,1100 2335,1100 2210,1100 ; 2210,1100 2210,1300 ; 2210,1300 2135,1300 2210,1300 ; 2210,1300 2210,2300 ; 2210,2300 2135,2300 2210,2300 ; 2210,2300 2210,2400 ; 2210,2400 2335,2400 2210,2400 ; 2210,2400 2210,3300 ; 2210,3300 2135,3300 2210,3300 ; 2210,3300 2210,3400 ; 2210,3400 2135,3400 2210,3400 ; 2210,3400 2210,4000 ; 2210,4000 2135,4000 2210,4000 ; 2760,1800 2835,1800 2760,1800 ; 2760,1800 2760,2100 ; 2760,2100 2835,2100 2760,2100 ; 2760,2100 2760,2700 ; 2760,2700 2835,2700 2760,2700 ; 2760,2700 2760,3200 ; 2760,3200 2835,3200 2760,3200 ; 2760,3200 2760,3500 ; 2760,3500 2760,3600 ; 2760,3600 2685,3600 2760,3600 ; 2760,3600 2760,3700 ; 2760,3700 2835,3700 2760,3700 ; 2760,3700 2760,4200 ; 2760,4200 2835,4200 2760,4200 ; 2760,4200 2760,4700 ; 2760,4700 2835,4700 2760,4700 ; 2760,4700 2760,5300 ; 2760,5300 2835,5300 2760,5300 ; 2760,5300 2760,5600 ; 2760,5600 2835,5600 2760,5600 ; 2910,2800 2835,2800 2910,2800 ; 2910,2800 2910,3300 ; 2910,3300 2835,3300 2910,3300 ; 2910,3300 2910,3800 ; 2910,3800 2835,3800 2910,3800 ; 2910,3800 2910,4300 ; 2910,4300 2835,4300 2910,4300 ; 3060,3300 3135,3300 3060,3300 ; 3060,3300 3060,3700 ; 3060,3700 3135,3700 3060,3700 ; 3060,3700 3060,4300 ; 3060,4300 3135,4300 3060,4300 ; 3060,5400 3135,5400 3060,5400 ; 3060,5400 3060,5750 3135,5825 3135,5875 ; 3060,5950 3135,5875 ; 3060,5950 3135,5875 ; 3210,1500 3285,1500 3210,1500 ; 3210,1500 3210,1600 ; 3210,1600 3135,1600 3210,1600 ; 3210,1600 3210,1700 ; 3210,1700 3135,1700 3210,1700 ; 3210,1700 3210,2200 ; 3210,2200 3135,2200 3210,2200 ; 3210,2200 3210,2800 ; 3210,2800 3135,2800 3210,2800 ; 3210,2800 3210,3800 ; 3210,3800 3135,3800 3210,3800 ; 3210,3800 3210,4850 ; 3210,4850 3135,4850 3210,4850 ; 4135,2550 4085,2550 4135,2550 ; 4310,650 4385,650 4310,650 ; 4310,650 4310,950 ; 4310,950 4385,950 4310,950 ; 4310,950 4310,1650 ; 4310,1650 4385,1650 4310,1650 ; 4310,1650 4310,1950 ; 4310,1950 4385,1950 4310,1950 ; 4310,1950 4310,2250 ; 4310,2250 4385,2250 4310,2250 ; 4310,2250 4310,2275 4360,2325 4360,2475 4310,2525 4310,2750 ; 4310,2750 4385,2750 4310,2750 ; 4310,2750 4310,3050 ; 4310,3050 4385,3050 4310,3050 ; 4310,3050 4310,3600 ; 4310,3600 4385,3600 4310,3600 ; 4310,3600 4310,3900 ; 4310,3900 4385,3900 4310,3900 ; 4310,3900 4310,4300 ; 4310,4300 4385,4300 4310,4300 ; 4310,4300 4310,4600 ; 4310,4600 4385,4600 4310,4600 ; 4760,1100 4685,1100 4760,1100 ; 4760,1100 4760,1750 ; 4760,1750 4685,1750 4760,1750 ; 4760,1750 4760,1850 ; 4760,1850 4685,1850 4760,1850 ; 4760,1850 4760,2550 ; 4760,2550 4685,2550 4760,2550 ; 4760,2550 4760,2650 ; 4760,2650 4685,2650 4760,2650 ; 4760,2650 4760,3400 ; 4760,3400 4685,3400 4760,3400 ; 4760,3400 4760,3500 ; 4760,3500 4685,3500 4760,3500 ; 4760,3500 4760,4100 ; 4760,4100 4685,4100 4760,4100 ; 4760,4100 4760,4200 ; 4760,4200 4685,4200 4760,4200 ; 4760,4200 4760,4900 ; 4760,4900 4685,4900 4760,4900 ; 5710,3750 5635,3750 5710,3750 ; 5710,3750 5710,3950 ; 5710,3950 5635,3950 5710,3950 ; 5960,1600 6035,1600 5960,1600 ; 5960,1600 5960,1725 6010,1775 6010,1925 5960,1975 5960,2500 ; 5960,2500 6035,2500 5960,2500 ; 5960,2500 5960,2900 ; 5960,2900 6035,2900 5960,2900 ; 5960,2900 5960,3200 ; 5960,3200 6035,3200 5960,3200 ; 5960,3200 5960,3900 ; 5960,3900 6035,3900 5960,3900 ; 5960,3900 5960,3925 6010,3975 6010,4125 5960,4175 5960,4400 ; 5960,4400 6035,4400 5960,4400 ; 5960,4400 5960,4700 ; 5960,4700 6035,4700 5960,4700 ; 5960,4700 5960,5100 ; 5960,5100 6035,5100 5960,5100 ; 6410,1700 6485,1700 6410,1700 ; 6410,1700 6410,2000 ; 6410,2000 6335,2000 6410,2000 ; 6410,2000 6410,2100 ; 6410,2100 6335,2100 6410,2100 ; 6410,2100 6410,2700 ; 6410,2700 6335,2700 6410,2700 ; 6410,2700 6410,2800 ; 6410,2800 6335,2800 6410,2800 ; 6410,2800 6410,3400 ; 6410,3400 6410,4000 ; 6410,4000 6335,4000 6410,4000 ; 6410,4000 6410,4200 ; 6410,4200 6335,4200 6410,4200 ; 6410,4200 6410,4300 ; 6410,4300 6335,4300 6410,4300 ; 7410,2300 7335,2300 7410,2300 ; 7410,4600 7335,4600 7410,4600 ; 7410,4600 7410,4800 ; 7410,4800 7335,4800 7410,4800 ; 7610,1600 7610,2200 ; 7610,2200 7610,2550 ; 7610,2550 7685,2550 7610,2550 ; 7610,2550 7610,2850 7685,2850 7660,2875 7660,3050 ; 7610,3550 7685,3550 7610,3550 ; 7610,3550 7610,3325 7660,3275 7660,3150 ; 7610,3550 7610,3850 ; 7610,3850 7685,3850 7610,3850 ; 7610,3850 7610,4150 ; 7610,4150 7685,4150 7610,4150 ; 7610,4150 7610,4450 ; 7610,4450 7685,4450 7610,4450 ; 7660,3050 7585,3050 7660,3050 ; 7660,3050 7660,3150 ; 7660,3150 7585,3150 7660,3150 ; 7760,2100 7685,2100 7760,2100 ; 7910,2650 7985,2650 7910,2650 ; 8060,1700 7985,1700 8060,1700 ; 8060,1700 8060,2000 8060,2100 ; 8060,2100 8135,2100 8060,2100 ; 8060,2100 8060,2350 ; 8060,2350 7985,2350 8060,2350 ; 8060,2350 8060,3350 ; 8060,3350 7985,3350 8060,3350 ; 8060,3350 8060,3450 ; 8060,3450 7985,3450 8060,3450 ; 8060,3450 8060,3950 ; 8060,3950 7985,3950 8060,3950 ; 8060,3950 8060,4050 ; 8060,4050 7985,4050 8060,4050 ; 8060,4050 8060,4550 ; 8060,4550 7985,4550 8060,4550 ; 8735,3050 8810,3050 ; 8735,3050 8810,3050 ; 8735,3050 8810,3050 ; 8760,1600 8835,1600 8760,1600 ; 8760,1600 8760,2200 ; 8760,2200 8835,2200 8760,2200 ; 8760,2200 8760,2550 ; 8760,2550 8835,2550 8760,2550 ; 8760,2550 8760,2850 ; 8760,2850 8835,2850 8760,2850 ; 8760,2850 8760,2875 8810,2925 8810,3050 ; 8760,3550 8835,3550 8760,3550 ; 8760,3550 8760,3850 ; 8760,3550 8760,3350 8760,3325 8810,3275 8810,3050 ; 8760,3850 8835,3850 8760,3850 ; 8760,3850 8760,4150 ; 8760,4150 8835,4150 8760,4150 ; 8760,4150 8760,4450 ; 8760,4450 8835,4450 8760,4450 ; 8910,2100 8835,2100 8910,2100 ; 9060,1725 9135,1800 ; 9060,1725 9135,1800 ; 9060,1975 9060,2025 9135,2100 9135,2200 9135,2250 9060,2325 9060,2650 ; 9060,1975 9135,1900 ; 9060,1975 9135,1900 ; 9060,2650 9135,2650 9060,2650 ; 9135,1800 9135,1900 ; 9210,1700 9135,1700 9210,1700 ; 9210,1700 9210,2100 ; 9210,2100 9285,2100 9210,2100 ; 9210,2100 9210,2350 ; 9210,2350 9135,2350 9210,2350 ; 9210,2350 9210,3350 ; 9210,3350 9135,3350 9210,3350 ; 9210,3350 9210,3450 ; 9210,3450 9135,3450 9210,3450 ; 9210,3450 9210,3950 ; 9210,3950 9135,3950 9210,3950 ; 9210,3950 9210,4050 ; 9210,4050 9135,4050 9210,4050 ; 9210,4050 9210,4550 ; 9210,4550 9135,4550 9210,4550